# Altium PCB UL-SWAP-DAQ-1.PcbDoc (part 2 of 2)
Units mil, origin at the board's own origin, x right, y up, seen from the top; angles counter-clockwise.
Board outline 2730 x 3320 mil, 4 copper layers (Top Layer, GND, PWR, Bottom Layer), stack 23.756 mil thick; 102 components, 111 nets, 461 pads, 104 vias.
Unrouted connection lines stored in the file: 58.
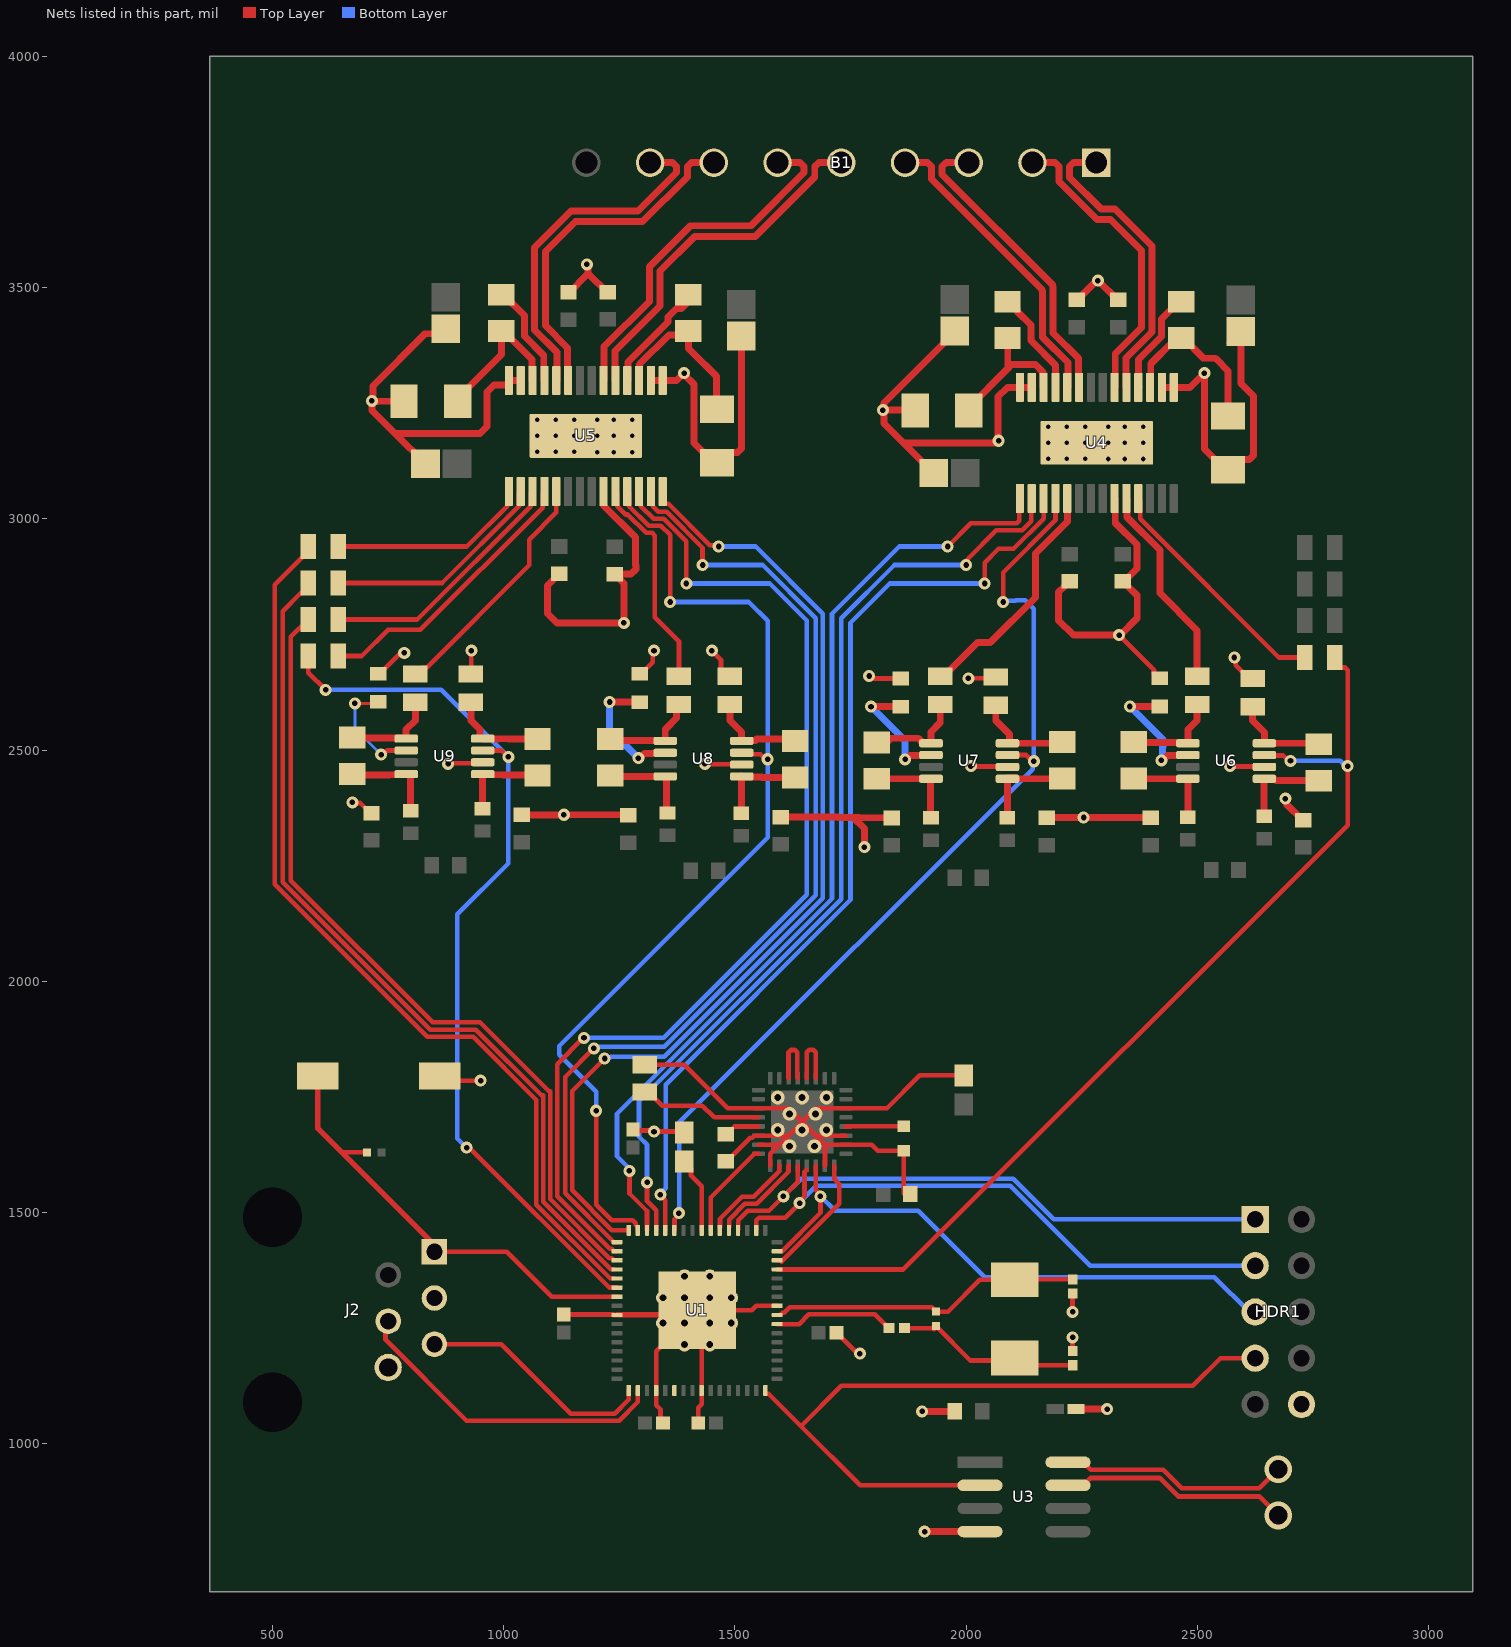
[diagram p4: the nets of this part, all layers, seen from the top]

## Via types
v1: diameter 26, hole 12, Top Layer to Bottom Layer, 94 vias
v2: diameter 42, hole 24, Top Layer to Bottom Layer, 8 vias
v3: diameter 60, hole 40, Top Layer to Bottom Layer, 2 vias

## Nets (pads, with @x,y where several pads share a name; then routed paths per layer and width w, separated by ;. In a path a pad name is that pad's centre, name@x,y a point inside that pad or via, vN(x,y) a via of type N, cw(c..) or ccw(c..) an arc to the next point about the centre after c; other vN are vias at no path point) (continued)
ADCSDI_PIC32SDO: HDR1.1 U1.52 | length 1292.3
  Top Layer w10: U1.52@1506.81,1461.5 1506.81,1482.79 1527.77,1503.75 1573.75,1503.75 v1(1605,1535) 1635.59,1565.59 1635.59,1601.22 1635.67,1601.3
  Bottom Layer w10: v1(1605,1535) 1643,1573 2101.81,1573 2189.81,1485 HDR1.1@2625,1485
ADCSDO_PIC32SDI: HDR1.5 U1.47 | length 1270.6
  Top Layer w10: U1.47@1598.27,1416.5 1602.03,1416.5 1685,1499.46 v1(1685,1535) 1685,1539.33 1675.04,1549.29 1675.04,1601.3
  Bottom Layer w10: v1(1685,1535) 1716.53,1503.47 1896.53,1503.47 2040,1360 2536.73,1360 2611.73,1285 HDR1.5@2625,1285
B_GP0: U1.62 U4.15 | length 2089.9
  Top Layer w10: v1(1272,1590) 1272,1541.1 1309.96,1503.14 U1.62@1309.96,1461.5 ; v1(1960,2940) 2009.95,2989.95 2109.09,2989.95 2114.95,2995.81 2114.95,3042.68 U4.15@2116.3,3044.03
  Bottom Layer w10: v1(1272,1590) 1272,1594.33 1245,1621.33 1245,1713.64 1710,2178.64 1710,2795 1855,2940 v1(1960,2940)
B_GP1: U1.61 U4.16 | length 2073.3
  Top Layer w10: v1(1310,1565) 1310,1524.31 1329.65,1504.67 U1.61@1329.65,1461.5 ; v1(2000,2900) 2003.06,2903.06 2003.06,2913.06 2064.95,2974.95 2115.31,2974.95 2115.36,2975 2121.21,2975 2141.11,2994.89 2141.11,3043.25 U4.16@2141.89,3044.03
  Bottom Layer w10: v1(1310,1565) 1310,1646.07 1292.7,1663.38 1292.7,1740.12 1730,2177.43 1730,2785 1845,2900 v1(2000,2900)
B_GP2: U1.60 U4.17 | length 2069.3
  Top Layer w10: v1(1338.7,1538.7) 1338.7,1536.97 1349.33,1526.34 U1.60@1349.33,1461.5 ; v1(2040,2860) 2040,2905 2070,2935 2102.43,2935 2167.48,3000.05 U4.17@2167.48,3044.03
  Bottom Layer w10: v1(1338.7,1538.7) 1338.7,1540.86 1350.39,1552.55 1350.39,1776.61 1750,2176.21 1750,2775 1835,2860 v1(2040,2860)
BSW: 
C_GP0: U1.64 U5.28 | length 2172.1
  Top Layer w10: v1(1218.11,1832.93) 1147.9,1762.72 1147.9,1547.69 1234.09,1461.5 U1.64@1270.59,1461.5 ; U5.28@1343.98,3059.03 1343.98,3036.39 1347.83,3032.53 1356.33,3032.53 1445.8,2943.06 1461.94,2943.06 v1(1465,2940)
  Bottom Layer w10: v1(1218.11,1832.93) 1221.17,1835.99 1230.96,1835.99 1231.97,1837 1347.15,1837 1690,2179.85 1690,2795 1545,2940 v1(1465,2940)
C_GP1: U1.1 U5.27 | length 2219.6
  Top Layer w10: v1(1195,1855) 1132.9,1792.9 1132.9,1541.47 1238.46,1435.91 U1.1@1245,1435.91 ; U5.27@1318.39,3059.03 1322.24,3055.17 1322.24,3027.41 1334.65,3015 1352.65,3015 1430,2937.65 v1(1430,2900)
  Bottom Layer w10: v1(1195,1855) 1198.06,1858.06 1347,1858.06 1675,2186.07 1675,2785 1560,2900 v1(1430,2900)
C_GP2: U1.2 U5.26 | length 2295.7
  Top Layer w10: v1(1173.68,1877.5) 1172.5,1877.5 1115.52,1820.52 1115.52,1535.4 1229.74,1421.18 1233.5,1421.18 1238.46,1416.22 U1.2@1245,1416.22 ; U5.26@1292.8,3059.03 1296.65,3055.17 1296.65,3027.41 1324.06,3000 1346.44,3000 1395,2951.44 v1(1395,2860)
  Bottom Layer w10: v1(1173.68,1877.5) 1174.18,1878 1345.72,1878 1655,2187.28 1655,2780 1575,2860 v1(1395,2860)
CB1: 
CB2: 
CN: 
CP: 
D_GP0: D_GP0.1 D_GP0.2 U1.5 U5.15 | length 2413.4
  Top Layer w10: D_GP0.2@577.52,2940 577.52,2930.16 505,2857.64 505,2210 835,1880 933.79,1880 1070.52,1743.26 1070.52,1516.76 1229.84,1357.44 U1.5@1238.19,1357.44 ; D_GP0.1@642.48,2940 920,2940 1007.44,3027.44 1007.44,3055.17 U5.15@1011.3,3059.03
D_GP1: D_GP2.1@642.48,2861.09 D_GP2.2@577.52,2861.09 U1.4 U5.16 | length 2362.8
  Top Layer w10: D_GP2.2@577.52,2861.09 577.52,2851.25 565.79,2839.52 561.62,2839.52 521.95,2799.85 521.95,2214.26 841.21,1895 940,1895 1081.74,1753.26 1085.52,1753.26 1085.52,1522.97 1231.37,1377.13 U1.4@1238.19,1377.13 ; D_GP2.1@642.48,2861.09 866.72,2861.09 1033.03,3027.41 1033.03,3055.17 U5.16@1036.89,3059.03
D_GP2: D_GP2.1@642.48,2782.18 D_GP2.2@577.52,2782.18 U1.3 U5.17 | length 2305.7
  Top Layer w10: D_GP2.2@577.52,2782.18 540,2744.66 540,2217.43 846.21,1911.21 948.79,1911.21 1098.1,1761.9 1100.52,1761.9 1100.52,1529.18 1228.49,1401.22 1233.78,1401.22 U1.3@1238.19,1396.81 ; D_GP2.1@642.48,2782.18 813.4,2782.18 1058.62,3027.41 1058.62,3055.17 U5.17@1062.48,3059.03
DOUT_N: U3.8 | length 495.1
  Top Layer w10: U3.8@2220.12,960 2253.68,960 2269.68,944 2426.02,944 2466.02,904 2634,904 v3(2675,945)
DOUT_P: U3.7 | length 499
  Top Layer w10: U3.7@2222.89,907.23 U3.7@2220.12,910 2253.68,910 2269.68,926 2418.56,926 2458.56,886 2634,886 v3(2675,845)
FB: 
FBN: 
FBP: 
GND: C1.1 C2.1 C3.1 C4.1 C5.2 C6.2 C7.2 C8.1 C9.2 C10.2 C11.1 C12.1 C13.1 C14.2 C15.2 C16.2 C17.2 C18.2 C19.2 C20.2 C21.2 C22.2 C23.2 C24.2 C25.2 C26.2 C27.2 C28.2 C29.2 C30.2 C31.2 C32.2 C33.2 C35.2 C36.2 C38.2 C39.2 C40.2 C42.2 C43.2 C44.2 C46.2 C47.2 C48.2 HDR1.10 J2.3 MCLR.1 pad. R9.1 R15.1 R21.1 R27.1 U1.9 U1.20 U1.25 U1.41 U1.65 U1.66 U1.67 U1.68 U1.69 U1.70 U1.71 U1.72 U1.73 U1.74 U1.75 U1.76 U1.77 U3.4 U4.1 U4.2 U4.13 U4.14 U4.23 U4.29 U4.30 U4.31 U4.32 U4.33 U4.34 U4.35 U4.36 U4.37 U4.38 U4.39 U4.40 U4.41 U4.42 U4.43 U4.44 U4.45 U4.46 U4.47 U5.1 U5.2 U5.13 U5.14 U5.23 U5.29 U6.6 U7.6 U8.6 U9.6 | length 9577.4
  Top Layer w10: v1(673,2386.94) 674.46,2385.48 690.28,2385.48 712.2,2363.56 C33.2@714.16,2363.56 ; C32.2@728.98,2665.07 731.93,2665.07 773.79,2706.94 781.94,2706.94 v1(785,2710) ; MCLR.1@861.89,1795 871.89,1785 v1(950,1785) ; v1(880,2470) 881.72,2471.72 953.01,2471.72 U9.6@954.73,2473.44 ; R9.1@928.98,2664.54 930,2665.57 v1(930,2715) ; C1.1@1130,1279.29 1237.6,1279.29 1238.46,1278.43 U1.9@1245,1278.43 ; C4.1@1283.85,1673.14 1287.85,1677.15 1322.85,1677.15 v1(1325,1675) 1388.14,1675 C5.2@1390,1673.14 ; C15.2@1293.98,2664.54 1296.93,2664.54 1321.94,2689.55 1321.94,2711.94 v1(1325,2715) ; C9.2@1305,1819.53 1390.47,1819.53 1484.69,1725.32 1615.98,1725.32 1645.51,1695.79 ; C2.1@1344.29,1045 1339.02,1050.28 1339.02,1074.17 1329.65,1083.54 U1.20@1329.65,1115.04 1329.65,1199.69 U1.65@1408.39,1278.43 ; C3.1@1420.71,1045 1420.71,1077.66 1428.07,1085.02 U1.25@1428.07,1115.04 1428.07,1278.43 U1.65@1418.23,1288.27 1535.98,1288.27 1545.83,1298.11 U1.41@1591.46,1298.11 ; v1(1435,2470) 1435.78,2469.22 1513.95,2469.22 U8.6@1514.73,2468.44 ; v1(1450,2715) 1469.8,2695.2 1469.8,2673.24 1483.5,2659.54 R15.1@1488.98,2659.54 ; C10.2@1480,1610.47 1481.97,1610.47 1532.99,1661.5 1537.56,1661.5 1542.32,1666.26 1615.98,1666.26 ; 1551.02,1646.57 1596.3,1646.57 ; 1576.61,1601.3 1576.61,1626.89 1596.3,1646.57 ; 1694.72,1601.3 1694.73,1646.57 ; C8.1@1719.29,1240 1720.08,1240 1762.02,1198.06 1766.94,1198.06 v1(1770,1195) ; 1740,1666.26 1675.04,1666.26 ; v1(1790,2660) 1794.33,2660 1799.79,2654.54 C39.2@1858.98,2654.54 ; C11.1@1865.75,1540 1865.37,1540.37 1865.37,1633.05 C12.1@1865,1633.43 1809.04,1633.43 1795.89,1646.57 1694.73,1646.57 ; C13.1@1995,1796.57 1900.05,1796.57 1828.8,1725.32 1675.04,1725.32 1645.51,1695.79 ; v1(2005,2655) 2061.01,2655 R21.1@2063.98,2657.97 ; v1(2010,2465) 2010.78,2464.22 2088.55,2464.22 U7.6@2089.33,2463.44 ; C7.2@2230,1200.35 v1(2230,1230) ; v1(2230,1285) C6.2@2230,1324.65 ; v1(2330.79,2748.29) 2406.26,2672.83 2406.26,2664.84 2416.02,2655.07 C43.2@2418.98,2655.07 ; v1(2570,2465) 2570.78,2464.22 2643.95,2464.22 U6.6@2644.73,2463.44 ; v1(2580,2700) 2583.06,2696.94 2583.06,2682.99 2611.51,2654.54 R27.1@2619.38,2654.54 ; 1596.3,1646.57 1615.98,1666.26 ; 1615.98,1666.26 1645.51,1695.79 ; 1645.51,1695.79 1675.04,1666.26 ; 1675.04,1666.26 1694.73,1646.57
  Top Layer w12: U1.9@1245,1278.43 1408.39,1278.43 U1.65@1418.23,1288.27 ; C23.2@1975,3405.98 C23.2@1999.63,3381.35 ; C26.2@2569.34,3380.38 C26.2@2593.98,3405.01
  Top Layer w15: 768.98,3184.03 948.98,3184.03 963.98,3199.03 963.98,3274.03 978.98,3289.03 1009.94,3289.03 1011.3,3290.39 U5.14@1011.3,3299.19 ; C18.2@784.54,3254.03 726.82,3254.03 726.9,3253.95 716.05,3253.95 v1(715,3255) ; C19.2@830.51,3119.03 767.24,3182.3 715,3234.54 v1(715,3255) ; C14.2@875,3410.98 864.03,3400.01 829.96,3400.01 717.1,3287.16 717.1,3257.1 v1(715,3255) ; U5.14@1014.13,3299.19 U5.13@1036.89,3299.19 ; C35.2@1039.19,2359.85 1039.38,2359.44 v1@1130,2359.44 ; C21.2@1120,2880.94 1118.03,2880.94 1109.78,2872.7 1109.78,2870.73 1095,2855.94 1095,2795 1115,2775 v1(1260,2775) 1260,2860.47 1250.22,2870.26 1250.22,2872.22 1241.97,2880.47 C22.2@1240,2880.47 1275.47,2880.47 1285.86,2890.86 1285.86,2899.14 1285,2900 1285,2960 1216.02,3028.98 U5.23@1216.02,3059.03 ; v1(1130,2360) 1267.94,2360 C36.2@1269.38,2358.56 ; C15.2@1140.19,3489.53 1142.15,3489.53 1180.41,3527.78 ; U5.29@1177.64,3179.11 U5.29@1216.02,3140.72 ; v1(1180,3550) 1182.1,3547.9 1182.1,3528.5 1182.51,3528.1 ; 1184.62,3528.41 1223.03,3490 C16.2@1225,3490 ; U5.29@1277.64,3144.11 U5.29@1278.99,3144.11 ; U5.2@1318.39,3299.19 1345.18,3299.19 1345.33,3299.03 1374.03,3299.03 v1(1390,3315) 1390,3312.02 1411.14,3290.88 1411.14,3164.26 1454.49,3120.91 C20.2@1461.43,3120.91 ; C20.2@1461.76,3121.24 1483.57,3143.05 1505.19,3143.05 1513.98,3151.84 C17.2@1513.98,3395.01 ; C38.2@1599.19,2354.85 1599.27,2354.92 1722.42,2354.92 ; 1722.5,2354.44 1755.56,2354.44 ; v1(1780,2290) 1780,2330 1755.56,2354.44 ; C40.2@1838.98,2353.03 1838.47,2353.53 1769.48,2353.53 1768.57,2354.44 1755.56,2354.44 ; 1868.98,3164.03 2058.98,3164.03 2068.98,3174.03 2068.98,3264.03 2089.13,3284.19 U4.14@2116.3,3284.19 ; C27.2@1889.54,3234.03 1888.57,3235 v1(1820,3235) ; v1(1905,1070) C48.2@1975.47,1070 ; v1(1910,810) U3.4@2029.88,810 ; C28.2@1929.96,3099.03 1929.53,3099.03 1822.1,3206.45 1822.1,3232.9 v1(1820,3235) ; C23.2@1975,3405.98 1951.87,3382.85 1951.87,3380.25 1822.1,3250.49 1822.1,3237.1 v1(1820,3235) ; U4.14@2118.98,3284.03 2141.73,3284.03 U4.13@2141.89,3284.19 ; C42.2@2173.98,2348.56 2179.45,2354.03 2328.98,2354.03 2329.21,2353.79 2399.14,2353.79 C44.2@2399.38,2353.56 ; C30.2@2223.98,2864.5 2222.01,2864.5 2213.76,2856.25 2213.76,2855.01 2200,2841.25 2200,2780 2231.71,2748.29 v1(2330.79,2748.29) 2333.29,2748.29 2370,2785 2370,2834 2349.19,2854.81 2349.19,2856.25 C31.2@2340.94,2864.5 ; C47.2@2234.53,1075 v1(2305,1075) ; C24.2@2238.98,3473.56 2240.94,3473.56 2282.39,3515 2285.57,3515 2327.01,3473.56 C25.2@2328.98,3473.56 ; U4.23@2321.02,3044.03 2322.38,3042.67 2322.38,2991.29 2369.19,2944.48 2369.19,2892.75 C31.2@2340.94,2864.5 ; C31.2@2338.98,2864.5 C31.2@2340.94,2864.5 ; U4.2@2423.39,3284.19 U4.1@2448.98,3284.19 2484.19,3284.19 v1(2515,3315) 2515,3150.4 C29.2@2559.49,3105.91 ; C29.2@2564.89,3104.37 2588.57,3128.05 2612.12,3128.05 2620.91,3136.84 2620.91,3265.54 2593.98,3292.47 C26.2@2593.98,3405.01 ; v1(2690,2395) 2692.1,2392.9 2692.1,2383.68 2727.23,2348.56 C46.2@2729.19,2348.56
  other v1: 2254.21,2354.03 2070,3168.67 2285,3515
INP: 
MCLR: J2.1 MCLR.2 R3.1 U1.7 | length 956.1
  Top Layer w10: 650,1630 R3.1@704.25,1630 ; J2.1@850.28,1415 1007.05,1415 1104.25,1317.8 U1.7@1245,1317.8
  Top Layer w12: MCLR.2@598.11,1795 598.11,1681.89 650,1630 J2.1@848.23,1431.77
MULTI: 
MUXOUT_ADCIN+:  | length 136.3
  Top Layer w10: 1655.35,1790.28 1655.35,1846.26 1661.03,1851.95 1669.32,1851.95 1675,1846.26 1675,1790.32 1675.04,1790.28
MUXOUT_ADCIN-:  | length 135.3
  Top Layer w10: 1615.98,1790.28 1615.98,1846.07 1621.35,1851.44 1629.63,1851.44 1635,1846.07 1635,1790.95 1635.67,1790.28
NetB2_4: 
NetC5_1: C5.1 U1.56 | length 164.3
  Top Layer w10: C5.1@1390,1610 1404.92,1595.08 1404.92,1580.08 1428.07,1556.93 U1.56@1428.07,1461.5
NetC6_1: C6.1 R2.1 U1.40 X1.1 | length 671.1
  Top Layer w10: U1.40@1598.27,1278.7 1602.95,1283.39 1606.72,1283.39 1618.33,1295 1925.75,1295 R2.1@1935,1285.75 1960.75,1285.75 2029.65,1354.65 X1.1@2105,1354.65 2105.71,1355.35 C6.1@2230,1355.35
NetC7_1: C7.1 R1.2 R2.2 X1.2 | length 502.7
  Top Layer w10: R1.2@1866.73,1250 R2.2@1930.75,1250 ; R2.2@1935,1254.25 2009.25,1180 2099.65,1180 X1.2@2105,1185.35 2115.71,1174.65 2106.17,1173.69 2065.71,1169.65 2106.17,1169.65 2115.71,1169.65 C7.1@2230,1169.65
  Top Layer w15: R2.2@1930.75,1250 R2.2@1935,1254.25
NetC15_1: C15.1@1293.98,2603.52 U8.2 | length 275
  Top Layer w15: v1(1229.23,2603.77) 1293.72,2603.77 C15.1@1293.98,2603.52 ; v1(1291.43,2482.22) 1294.41,2482.22 1304.86,2492.67 1348.02,2492.67 U8.2@1349.38,2494.03
  Bottom Layer w15: v1(1229.23,2603.77) 1229.23,2544.42 v1(1291.43,2482.22)
NetC18_1: C18.1 R4.1 U5.12 | length 328
  Top Layer w15: C18.1@900.78,3254.03 900.78,3260.97 995,3355.19 R4.1@995,3405.66 999.92,3405.66 1061.12,3344.45 1061.12,3300.55 U5.12@1062.48,3299.19
NetC20_1: C20.1 R5.1 U5.3 | length 365.2
  Top Layer w15: U5.3@1292.8,3299.19 1294.15,3300.55 1294.15,3334.15 1357.26,3397.26 1391.12,3397.26 R5.1@1399.51,3405.66 1399.51,3368.32 1408.3,3359.53 1408.59,3359.53 1460,3308.12 1460,3239.48 C20.1@1457.67,3237.15
NetC27_1: C27.1 R6.1 U4.12 | length 310.6
  Top Layer w15: C27.1@2005.78,3234.03 2005.78,3240.97 2089.9,3325.09 ; R6.1@2089.9,3390.22 2089.9,3325.09 ; U4.12@2167.48,3284.19 2166.12,3285.55 2166.12,3316.85 2149.83,3333.14 2097.95,3333.14 2089.9,3325.09
NetC29_1: C29.1 R7.1 U4.3 | length 372.4
  Top Layer w15: U4.3@2397.8,3284.19 2399.15,3285.55 2399.15,3335.23 2445.93,3382 2445.93,3388.31 2448.27,3390.66 2469.92,3390.66 2513.51,3347.07 2537.93,3347.07 2540,3345 2541.04,3345 2566.43,3319.61 C29.1@2566.43,3222.15
NetC32_1: C32.1 U9.2 | length 244.4
  Top Layer w6: v1(678.29,2600.76) 725.69,2600.76 C32.1@728.98,2604.05
  Top Layer w10: v1(735,2490) 739.33,2490 748.36,2499.03 U9.2@789.38,2499.03
  Bottom Layer w6: v1(678.29,2600.76) 678.29,2546.71 v1(735,2490)
NetC39_1: C39.1 U7.2 | length 269.1
  Top Layer w15: v1(1794.23,2593.77) 1858.72,2593.77 C39.1@1858.98,2593.52 ; v1(1867.93,2479.86) 1870.91,2479.86 1878.73,2487.67 1922.62,2487.67 U7.2@1923.98,2489.03
  Bottom Layer w15: v1(1794.23,2593.77) 1867.93,2520.07 v1(1867.93,2479.86)
NetC43_1: C43.1 U6.2 | length 269
  Top Layer w15: v1(2353.99,2594.04) C43.1@2413.55,2594.04 ; v1(2422.16,2477.62) 2425.14,2477.62 2435.19,2487.67 2478.02,2487.67 U6.2@2479.38,2489.03
  Bottom Layer w15: v1(2353.99,2594.04) 2425.58,2522.43 2425.58,2507.43 2424.27,2506.13 2424.27,2479.72 v1(2422.16,2477.62)
NetR1_1: R1.1 U1.39 | length 263
  Top Layer w10: U1.39@1591.46,1258.74 1638.76,1258.74 1660.02,1280 1802.28,1280 1832.28,1250 R1.1@1833.27,1250
NetR4_2: R4.2 U5.11 | length 226.6
  Top Layer w15: R4.2@995,3484.4 999.92,3484.4 1045,3439.32 1045,3395 1086.71,3353.29 1086.71,3300.55 U5.11@1088.07,3299.19
NetR5_2: R5.2 U5.4 | length 249.5
  Top Layer w15: U5.4@1268.56,3300.55 1268.56,3338.56 1355,3425 1355,3435.96 1373.51,3454.47 1384.47,3454.47 1399.51,3469.51 R5.2@1399.51,3489.37
NetR6_2: R6.2 U4.11 | length 231
  Top Layer w15: R6.2@2089.46,3469.4 2094.38,3469.4 2110.51,3453.27 2110.51,3448.35 2140,3418.86 2140,3385 2193.07,3331.93 U4.11@2193.07,3284.19
NetR7_2: R7.2 U4.4 | length 228.4
  Top Layer w15: U4.4@2373.56,3285.55 U4.4@2372.2,3284.19 2372.2,3344.17 2422.19,3394.16 2422.19,3431.51 2460.08,3469.4 R7.2@2465,3469.4
NetR8_2: R8.2 R10.1 U9.1 | length 187.4
  Top Layer w15: R10.1@690,2524.37 691.78,2524.37 693.39,2525.98 788.02,2525.98 U9.1@788.98,2525.03 ; U9.1@789.38,2524.62 U9.1@788.98,2525.03 ; R8.2@808.98,2603.52 808.98,2564.03 788.98,2544.03 U9.1@788.98,2525.03
NetR9_2: R9.2 R11.1 U9.8 | length 207.3
  Top Layer w15: R9.2@928.98,2603.52 928.98,2564.03 948.98,2544.03 948.98,2525.98 950.33,2524.62 U9.8@954.73,2524.62 ; U9.8@955.25,2524.11 989.17,2524.11 989.44,2524.37 1010.56,2524.37 1010.83,2524.11 R11.1@1070.15,2524.11
NetR10_2: R10.2 R12.1 U9.4 | length 178.1
  Top Layer w15: R10.2@690,2445.63 690.13,2445.5 752.56,2445.5 753.55,2446.49 788.02,2446.49 U9.4@789.38,2447.85 ; R12.1@798.98,2368.81 U9.4@798.98,2446.49
NetR11_2: R11.2 R13.1 U9.5 | length 209.4
  Top Layer w15: R13.1@954.38,2373.26 954.56,2373.44 U9.5@954.56,2448.45 ; U9.5@970.29,2449.03 953.98,2449.03 U9.5@954.56,2448.45 ; R11.2@1070.15,2445.63 998.96,2445.63 998.1,2446.49 970.29,2446.49 956.09,2446.49 U9.5@954.73,2447.85 U9.5@954.56,2448.45
NetR14_2: R14.2 R16.1 U8.1 | length 192.4
  Top Layer w15: R16.1@1250,2519.37 1251.13,2520.5 1348.5,2520.5 U8.1@1349.38,2519.62 1349.38,2544.43 1373.98,2569.03 1373.98,2594.03 1378.98,2599.03 R14.2@1378.98,2598.52
NetR15_2: R15.2 R17.1 U8.8 | length 188.1
  Top Layer w15: R15.2@1488.98,2598.52 1488.98,2564.03 1513.98,2539.03 1513.98,2520.38 U8.8@1514.73,2519.62 1516.09,2520.98 1544.06,2520.98 1546.51,2523.43 1605.94,2523.43 R17.1@1610,2519.37
NetR16_2: R16.2 R18.1 U8.4 | length 179.3
  Top Layer w15: R16.2@1250,2440.63 1252.22,2442.85 U8.4@1349.38,2442.85 ; U8.4@1351.79,2441.84 1351.79,2366.21 R18.1@1354.19,2363.81
NetR17_2: R17.2 R19.1 U8.5 | length 203.2
  Top Layer w15: R19.1@1513.98,2363.26 1514.36,2363.64 U8.5@1514.36,2443.65 ; U8.5@1513.98,2444.03 U8.5@1514.36,2443.65 ; R17.2@1635,2440.63 R17.2@1630,2440.63 1558.96,2440.63 1558.1,2441.49 1516.09,2441.49 U8.5@1514.73,2442.85 U8.5@1514.36,2443.65
NetR20_2: R20.2 R22.1 U7.1 | length 194.5
  Top Layer w15: R22.1@1829.49,2517.48 1837.49,2525.48 1896.39,2525.48 1907.24,2514.62 U7.1@1923.98,2514.62 1923.98,2539.03 1943.98,2559.03 R20.2@1943.98,2598.52
NetR21_2: R21.2 R23.1 U7.8 | length 214.8
  Top Layer w10: R23.1@2226.48,2513.33 R23.1@2227.7,2512.11
  Top Layer w15: R21.2@2063.98,2596.94 2063.98,2564.03 2093.98,2534.03 2093.98,2515.98 U7.8@2092.62,2514.62 ; U7.8@2105.47,2514.03 2089.33,2514.03 U7.8@2089.33,2514.62 U7.8@2092.62,2514.62 ; R23.1@2189.64,2516.39 2187.88,2514.62 2105.47,2514.62 U7.8@2092.62,2514.62
NetR22_2: R22.2 R24.1 U7.4 | length 173.1
  Top Layer w15: R22.2@1829.49,2438.74 1830.38,2437.85 U7.4@1923.98,2437.85 ; U7.4@1923.07,2431.33 1923.07,2355.71 R24.1@1923.98,2353.26
NetR23_2: R23.2 R25.1 U7.5 | length 203.2
  Top Layer w15: R25.1@2088.98,2353.26 2089.15,2353.44 U7.5@2089.15,2438.85 ; U7.5@2104.88,2439.03 2088.98,2439.03 U7.5@2089.15,2438.85 ; R23.2@2189.64,2437.65 2189.44,2437.85 2104.88,2437.85 U7.5@2089.33,2437.85 U7.5@2089.15,2438.85
NetR26_2: R26.2 R28.1 U6.1 | length 191.8
  Top Layer w15: R28.1@2381.21,2514.75 2382.27,2514.75 2383.5,2515.98 2478.02,2515.98 U6.1@2479.38,2514.62 2479.38,2544.43 2498.98,2564.03 R26.2@2498.98,2599.03
NetR27_2: R27.2 R29.1 U6.8 | length 199.9
  Top Layer w15: R27.2@2619.38,2593.52 2618.98,2594.03 2618.98,2564.03 2644.73,2538.27 U6.8@2644.73,2514.62 2741.01,2514.62 R29.1@2741.99,2515.6 ; R29.1@2762.16,2512.34 R29.1@2773.68,2512.34
NetR28_2: R28.2 R30.1 U6.4 | length 182.2
  Top Layer w15: R28.2@2381.21,2436.01 2383.06,2437.85 U6.4@2479.38,2437.85 R30.1@2479.38,2354.56
NetR29_2: R29.2 R31.1 U6.5 | length 198.7
  Top Layer w15: R31.1@2644.38,2356.96 U6.5@2644.38,2436.49 ; U6.5@2644.73,2437.85 2646.09,2436.49 2667.34,2436.49 2670.23,2433.6 R29.2@2762.16,2433.6
NetR39_1: 
NetU1_22: U1.22
NetU1_46: U1.46 | length 270.7
  Top Layer w10: U1.46@1591.46,1396.54 U1.46@1597.99,1396.54 ; U1.46@1600.64,1393.89 1726,1519.25 1726,1560.93 1714.41,1572.52 1714.41,1601.3
NetU1_53: U1.53 | length 201.1
  Top Layer w10: U1.53@1487.4,1468.31 1487.4,1484.6 1521.56,1518.75 1546.97,1518.75 1615.91,1587.69 1615.91,1601.22 1615.98,1601.3
NetU1_54: U1.54 | length 201.1
  Top Layer w10: U1.54@1467.72,1468.31 1467.72,1486.13 1515.34,1533.75 1540.75,1533.75 1596.22,1589.22 1596.22,1601.22 1596.3,1601.3
NetU1_55: U1.55 | length 213.3
  Top Layer w10: U1.55@1447.76,1461.5 1447.76,1532.32 1542.32,1626.89 1551.02,1626.89
OUTN: 
PGA_A_Out: R26.1 U4.24 | length 447.8
  Top Layer w15: U4.24@2346.61,3044.03 2347.97,3042.67 2347.97,3003.29 2418.98,2932.29 2418.98,2839.03 2499.38,2758.63 R26.1@2499.38,2659.54
PGA_B_Out: R20.1 U4.19 | length 519.8
  Top Layer w15: R20.1@1943.98,2659.54 1951.85,2659.54 2024.43,2732.12 2052.07,2732.12 2150,2830.05 2150,2925 2219.5,2994.5 2219.5,3043.19 U4.19@2218.66,3044.03
PGA_C_Out: R14.1 U5.24 | length 466.7
  Top Layer w10: U5.24@1241.61,3059.03 1245.47,3055.17 1245.47,3027.41 1263.77,3009.11 1268.15,3009.11 1307.86,2969.39 1321.14,2969.39 1327,2963.54 1327,2787.37 1378.98,2735.4 R14.1@1378.98,2659.54
PGA_D_Out: R8.1 U5.19 | length 526.9
  Top Layer w10: R8.1@808.98,2664.54 822.68,2678.24 833.24,2678.24 1055,2900 1055,2955 1113.66,3013.66 U5.19@1113.66,3059.03
PGC: J2.5 U1.17 | length 514.6
  Top Layer w10: J2.5@850.28,1215 995,1215 1145,1065 1240,1065 1270.59,1095.59 U1.17@1270.59,1115.04
PGD: J2.4 U1.18 | length 701.9
  Top Layer w10: J2.4@750.28,1265 744.61,1259.33 744.61,1225.04 919.65,1050 1250,1050 1290.28,1090.28 U1.18@1290.28,1115.04
Qnet: 
REFBUF: C9.1 | length 268.7
  Top Layer w10: C9.1@1305,1760.47 1312.87,1760.47 1342.43,1730.91 1429.7,1730.91 1454.98,1705.63 1551.02,1705.63
REFIN: C10.1 | length 77.8
  Top Layer w10: C10.1@1480,1669.53 1481.97,1669.53 1498.38,1685.94 1551.02,1685.94
Reserved: J2.6
SCK: HDR1.3 U1.50 | length 1283.3
  Top Layer w10: U1.50@1546.18,1461.5 1546.18,1482.89 1552.04,1488.75 1608.75,1488.75 v1(1640,1520) 1640,1524.33 1650.59,1534.92 1650.59,1587.84 1655.28,1592.52
  Bottom Layer w10: v1(1640,1520) 1640,1522.53 1675.47,1558 2095.6,1558 2268.6,1385 HDR1.3@2625,1385
Sensor_A_N: B1.1 U4.5 | length 653.3
  Top Layer w15: B1.1@2281.18,3770 2232.57,3770 2223.78,3761.21 2223.78,3738.32 2292.15,3669.96 2321.64,3669.96 2402.19,3589.4 2402.19,3404.05 2345.32,3347.18 2345.32,3285.48 U4.5@2346.61,3284.19
Sensor_A_P: B1.2 U4.6 | length 653.3
  Top Layer w15: B1.2@2143.39,3770 2192,3770 2200.78,3761.21 2200.78,3728.79 2282.62,3646.96 2312.11,3646.96 2379.19,3579.87 2379.19,3413.58 2322.32,3356.7 2322.32,3285.48 U4.6@2321.02,3284.19
Sensor_B_N: B1.4 U4.10 | length 660.7
  Top Layer w15: B1.4@1867.8,3770 1916.41,3770 1925.19,3761.21 1925.19,3734.81 2164.26,3495.74 2164.26,3493.59 2165.01,3492.84 2165.01,3392.46 2219.96,3337.52 2219.96,3285.48 U4.10@2218.66,3284.19
Sensor_B_P: B1.3 U4.9 | length 660.7
  Top Layer w15: B1.3@2005.59,3770 1956.98,3770 1948.19,3761.21 1948.19,3744.33 2187.26,3505.27 2187.26,3503.12 2188.01,3502.37 2188.01,3401.99 2242.96,3347.04 2242.96,3285.48 U4.9@2244.25,3284.19
Sensor_C_N: B1.5 U5.5 | length 779.3
  Top Layer w15: U5.5@1241.61,3299.19 1240.32,3300.48 1240.32,3362.59 1337.93,3460.2 1337.93,3535.4 1413.14,3610.61 1543.96,3610.61 1672.6,3739.26 1672.6,3761.21 1681.39,3770 B1.5@1730,3770
Sensor_C_P: B1.6 U5.6 | length 779.3
  Top Layer w15: U5.6@1216.02,3299.19 1217.32,3300.48 1217.32,3372.12 1314.93,3469.73 1314.93,3544.93 1403.61,3633.61 1534.43,3633.61 1649.6,3748.79 1649.6,3761.21 1640.82,3770 B1.6@1592.2,3770
Sensor_D_N: B1.8 U5.10 | length 755.7
  Top Layer w15: U5.10@1113.66,3299.19 1114.96,3300.48 1114.96,3360.04 1066.97,3408.03 1066.97,3586.97 1145.3,3665.3 1290.53,3665.3 1374.01,3748.79 1374.01,3761.21 1365.23,3770 B1.8@1316.61,3770
Sensor_D_P: B1.7 U5.9 | length 755.7
  Top Layer w15: U5.9@1139.25,3299.19 1137.96,3300.48 1137.96,3369.57 1089.97,3417.56 1089.97,3577.44 1154.83,3642.3 1300.06,3642.3 1397.01,3739.26 1397.01,3761.21 1405.8,3770 B1.7@1454.41,3770
SHDN-A: SHDN_A.1 SHDN_A.2 U1.45 U4.25 U6.7 | length 2730
  Top Layer w10: U1.45@1591.46,1376.85 1864.32,1376.85 2825,2337.53 v1(2825,2465) 2825,2672.48 2819.06,2678.43 2809.21,2678.43 2797.48,2690.16 SHDN_A.2@2797.48,2700 ; U4.25@2372.2,3044.03 2376.06,3040.17 2376.06,2999.95 2676.01,2700 SHDN_A.1@2732.52,2700 ; U6.7@2644.73,2489.03 2648.42,2485.35 2651.22,2488.15 2685.32,2488.15 2696.95,2476.53 v1(2701.28,2476.53)
  Bottom Layer w10: v1(2701.28,2476.53) 2809.15,2476.53 2820.67,2465 v1(2825,2465)
SHDN-B: U1.59 U4.18 U7.7 | length 2074.3
  Top Layer w10: U1.59@1369.02,1461.5 1369.29,1461.77 1369.29,1484.96 1378.7,1494.37 v1(1378.7,1498.7) ; v1(2080,2820) 2080,2883.76 2193.07,2996.83 U4.18@2193.07,3044.03 ; U7.7@2089.33,2489.03 2089.38,2489.08 2129.92,2489.08 2143.3,2475.7 v1(2146.22,2475.7)
  Bottom Layer w10: v1(1378.7,1498.7) 1380,1500 1380,1695 2143.66,2458.66 2143.66,2473.14 v1(2146.22,2475.7) 2146.22,2805.25 2127.93,2823.54 2107.9,2823.54 2107.42,2823.06 2083.06,2823.06 v1(2080,2820)
SHDN-C: U1.63 U5.25 U8.7 | length 2184
  Top Layer w10: v1(1200,1720) 1200,1516.8 1233.49,1483.31 1278.76,1483.31 1285.31,1476.76 1285.31,1472.99 1290.28,1468.03 U1.63@1290.28,1461.5 ; U5.25@1267.2,3059.03 1271.06,3055.17 1271.06,3027.41 1313.47,2985 1340,2985 1360,2965 v1(1360,2820) ; U8.7@1514.73,2494.03 1517.63,2491.13 1555.32,2491.13 1566.46,2480 v1(1570.79,2480)
  Bottom Layer w10: v1(1200,1720) 1200,1761.31 1120,1841.31 1120,1860 1570.79,2310.79 1570.79,2779.21 1530,2820 v1(1360,2820)
SHDN-D: SHDN_D.1 SHDN_D.2 U1.6 U5.18 U9.7 | length 2565.2
  Top Layer w10: SHDN_D.2@577.52,2703.28 577.52,2667.48 v1(615,2630) ; SHDN_D.1@642.48,2703.28 693.28,2703.28 750,2760 820,2760 1084.21,3024.21 1084.21,3055.17 U5.18@1088.07,3059.03 ; v1(920,1640) 923.06,1636.94 929.13,1636.94 1228.31,1337.76 1244.72,1337.76 U1.6@1245,1337.48 ; U9.7@954.73,2499.03 954.81,2498.95 995.32,2498.95 1009.27,2485 v1(1010,2485)
  Bottom Layer w10: v1(615,2630) 865,2630 v1(1010,2485) 1010,2254.57 900,2144.57 900,1660 v1(920,1640)
SW1: 
SW2: 
U1TX: HDR1.7 U1.32 U3.2 | length 1588.8
  Top Layer w10: U1.32@1566.14,1108.23 1572.68,1108.23 1642.95,1037.95 ; U3.2@2029.88,910 1770.91,910 1642.95,1037.95 ; HDR1.7@2625,1185 2550,1185 2490,1125 1730,1125 1642.95,1037.95
VDDLBYP: C12.2 | length 125.3
  Top Layer w10: 1740,1685.94 1748.7,1685.94 1749.33,1686.57 C12.2@1865,1686.57
Vin: 
VREF: 
pads on no net: B1.9 HDR1.9 J2.MH1 J2.MH2 U1.8 U1.11 U1.12 U1.13 U1.14 U1.15 U1.16 U1.21 U1.23 U1.24 U1.27 U1.28 U1.29 U1.30 U1.31 U1.33 U1.34 U1.36 U1.37 U1.48 U1.49 U1.51 U1.58 U2.1 U2.2 U2.3 U2.4 U2.5 U2.6 U2.7 U2.8 U2.9 U2.10 U2.11 U2.12 U2.13 U2.14 U2.15 U2.16 U2.17 U2.18 U2.19 U2.20 U2.21 U2.22 U2.23 U2.24 U2.25 U2.26 U2.27 U2.28 U2.29 U2.30 U2.31 U2.32 U2.33 U3.3 U3.5 U3.6

## Polygon pours and split planes (outlines as drawn)
GND on Top Layer "GND_L01_P004" (solid, pour order 4): 1030,3245 1325,3245 1325,3115 1030,3115
GND on Top Layer "GND_L01_P003" (solid, pour order 3): 2130,3230 2430,3230 2430,3100 2130,3100
GND on Top Layer "GND_L01_P002" (solid, pour order 2): 1285,1420 1550,1420 1550,1155 1285,1155
GND on GND (split plane): 3074.9,700.1 385.1,700.1 385.1,3979.9 3074.9,3979.9
+3.3V on PWR (split plane): 2509.91,1235 2510.26,1232.39 2511.26,1229.96 2512.87,1227.87 2514.96,1226.27 2517.39,1225.26 2520,1224.91 2794.91,1224.91 2794.91,700.1 525.09,700.1 525.09,1775 525.09,1864.91 2509.91,1864.91
+5V on PWR (split plane): 3074.9,700.1 2815.09,700.1 2815.09,1235 2814.74,1237.61 2813.73,1240.04 2812.13,1242.13 2810.04,1243.73 2807.61,1244.74 2805,1245.09 2530.09,1245.09 2530.09,1875 2529.74,1877.61 2528.74,1880.04 2527.13,1882.13 2525.04,1883.73 2522.61,1884.74 2520,1885.09 515,1885.09 512.39,1884.74 509.96,1883.73 507.87,1882.13 506.26,1880.04 505.26,1877.61 504.91,1875 504.91,1775 504.91,700.1 385.1,700.1 385.1,3979.9 3074.9,3979.9
+10.5V on PWR (split plane): 1312.87,3442.87 1314.96,3441.26 1315.67,3440.97 1317.39,3440.26 1320,3439.91 1590,3439.91 1592.61,3440.26 1595.04,3441.26 1597.13,3442.87 1754.18,3599.91 2274.91,3599.91 2274.91,3454.18 1895.37,3074.63 1893.77,3072.54 1892.76,3070.11 1892.41,3067.5 1892.76,3064.89 1893.77,3062.46 1895.37,3060.37 2012.87,2942.87 2014.96,2941.26 2017.39,2940.26 2020,2939.91 2390.82,2939.91 2422.87,2907.87 2427.87,2902.87 2662.87,2667.87 2849.91,2480.82 2849.91,1350.09 2685.09,1350.09 2685.09,1424.91 2795,1424.91 2797.61,1425.26 2800.04,1426.27 2802.13,1427.87 2803.74,1429.96 2804.74,1432.39 2805.09,1435 2805.09,2410 2804.74,2412.61 2804.03,2414.33 2803.74,2415.04 2802.13,2417.13 2362.13,2857.13 2360.04,2858.74 2357.61,2859.74 2355,2860.09 2285,2860.09 2282.39,2859.74 2279.96,2858.74 2277.87,2857.13 2276.26,2855.04 2275.26,2852.61 2274.91,2850 2274.91,2760.09 2190.09,2760.09 2190.09,2850 2189.74,2852.61 2188.74,2855.04 2187.13,2857.13 2185.04,2858.74 2182.61,2859.74 2180,2860.09 1215,2860.09 1212.46,2859.75 1185.09,2887.12 1185.09,2890 1184.74,2892.61 1183.73,2895.04 1182.13,2897.13 1180.04,2898.74 1177.61,2899.74 1175,2900.09 1172.39,2899.74 1169.96,2898.74 1167.87,2897.13 1166.27,2895.04 1165.26,2892.61 1164.91,2890 1164.91,2782.59 1100.79,2782.59 795.09,3088.29 795.09,3614.91 1140.82,3614.91
-10V on PWR (split plane): 2549.91,3725 2549.91,3540.09 2295.09,3540.09 2295.09,3610 2294.74,3612.61 2293.74,3615.04 2292.13,3617.13 2290.04,3618.74 2287.61,3619.74 2285,3620.09 1750,3620.09 1747.39,3619.74 1745.67,3619.03 1744.96,3618.74 1742.87,3617.13 1585.82,3460.09 1324.18,3460.09 1152.13,3632.13 1150.04,3633.74 1147.61,3634.74 1145,3635.09 785,3635.09 782.39,3634.74 779.96,3633.74 777.87,3632.13 776.26,3630.04 775.26,3627.61 774.91,3625 774.91,3084.11 775.26,3081.5 776.26,3079.07 777.87,3076.98 1089.48,2765.37 1091.57,2763.76 1094,2762.76 1096.61,2762.41 1175,2762.41 1177.61,2762.76 1180.04,2763.76 1182.13,2765.37 1183.73,2767.46 1184.74,2769.89 1185.09,2772.5 1185.09,2872.7 1205.25,2852.54 1204.91,2850 1205.26,2847.39 1206.27,2844.96 1207.87,2842.87 1209.96,2841.26 1212.39,2840.26 1215,2839.91 2169.91,2839.91 2169.91,2750 2170.26,2747.39 2171.26,2744.96 2172.87,2742.87 2174.96,2741.26 2177.39,2740.26 2180,2739.91 2285,2739.91 2287.61,2740.26 2290.04,2741.26 2292.13,2742.87 2293.74,2744.96 2294.74,2747.39 2295.09,2750 2295.09,2839.91 2350.82,2839.91 2784.91,2405.82 2784.91,1445.09 2685.09,1445.09 2685.09,2265 2684.74,2267.61 2683.74,2270.04 2682.13,2272.13 2357.13,2597.13 2355.04,2598.74 2352.61,2599.74 2350,2600.09 1084.18,2600.09 575.09,3109.18 575.09,3869.91 2549.91,3869.91

## Other copper
PWR (plane layer: these items are gaps in the copper):
  lines w10: 1175,2890 1215,2850
  lines w20: 515,685 515,1775 515,1875 2520,1875 2520,1235 2805,1235 2805,685 ; 1175,2890 1175,2772.5 1096.61,2772.5 785,3084.11 785,3625 1145,3625 1320,3450 1590,3450 1750,3610 2285,3610 2285,3450 1902.5,3067.5 2020,2950 2395,2950 2430,2915 2860,2485 2860,1340 2675,1340 2675,1435 ; 1215,2850 2180,2850 2180,2750 2285,2750 2285,2850 2355,2850 2795,2410 2795,1435 2675,1435 ; 2285,3530 2555,3530 2560,3535 2560,3725 2560,3880 565,3880 565,3105 1080,2590 1357.5,2590 2350,2590 2675,2265 2675,1435 ; 2435,2920 2435,2910 2670,2675

## Silkscreen, mask and mechanical layers (free items; w line width, h text height)
Top Overlay:
  circle w7.87: c2470,2690 r1.97
  circle w7.87: c1885.16,2276 r1.97
  circle w7.87: c1320.16,2381 r1.97
  circle w7.87: c650.16,2556 r1.97
  circle w7.87: c758.98,2284.03 r1.97
  circle w7.87: c2135,2550 r1.97
  circle w7.87: c2498.98,3259.03 r1.97
  circle w7.87: c2510,3375 r1.97
  circle w7.87: c2528.98,3519.03 r1.97
  circle w7.87: c2685,2550 r1.97
  circle w7.87: c2584.38,2674.03 r1.97
  circle w7.87: c2510,2195 r1.97
  circle w7.87: c2445,2565 r1.97
  circle w7.87: c2320,2550 r1.97
  circle w7.87: c1785,2540 r1.97
  circle w7.87: c2445,2275 r1.97
  circle w7.87: c2445,2375 r1.97
  circle w7.87: c2610,2375 r1.97
  circle w7.87: c2150,3375 r1.97
  circle w7.87: c2273.98,3394.03 r1.97
  circle w7.87: c1489.38,2374.03 r1.97
  circle w7.87: c1305,2280 r1.97
  circle w7.87: c1338.98,2679.03 r1.97
  circle w7.87: c1378.98,2189.03 r1.97
  circle w7.87: c1454.38,2679.03 r1.97
  circle w7.87: c1603.98,2574.03 r1.97
  circle w7.87: c1010,2560 r1.97
  circle w7.87: c890,2685 r1.97
  circle w7.87: c920,2295 r1.97
  circle w7.87: c763.98,2589.03 r1.97
  circle w7.87: c923.98,2394.03 r1.97
  circle w7.87: c1083.98,2279.03 r1.97
  circle w7.87: c1648.98,2269.03 r1.97
  circle w7.87: c763.98,2389.03 r1.97
  circle w7.87: c2038.98,3304.03 r1.97
  circle w7.87: c2358.98,3394.03 r1.97
  circle w7.87: c2043.98,2249.03 r1.97
  circle w7.87: c2218.98,2264.03 r1.97
  circle w7.87: c1868.98,2249.03 r1.97
  circle w7.87: c1903.98,2674.03 r1.97
  circle w7.87: c1893.98,2579.03 r1.97
  circle w7.87: c1890,2375 r1.97
  circle w7.87: c2055,2375 r1.97
  circle w7.87: c2023.98,2669.03 r1.97
  circle w7.87: c2773.98,2269.03 r1.97
  circle w7.87: c2038.98,3159.03 r1.97
  circle w7.87: c1933.98,3524.03 r1.97
  lines w10: 773.98,2604.03 773.98,2664.03 ; 844.38,2604.03 844.38,2664.03 ; 893.98,2604.03 893.98,2664.03 ; 963.98,2604.03 963.98,2664.03 ; 1339.38,2599.03 1339.38,2659.03 ; 1419.38,2599.03 1419.38,2659.03 ; 1449.38,2601.12 1449.38,2661.12 ; 1529.38,2601.12 1529.38,2661.12 ; 1913.98,2604.03 1913.98,2654.03 ; 1973.98,2604.03 1973.98,2654.03 ; 2033.98,2604.03 2033.98,2654.03 ; 2093.98,2604.03 2093.98,2654.03 ; 2469.38,2599.03 2469.38,2659.03 ; 2529.38,2599.03 2529.38,2659.03 ; 2589.38,2596.12 2589.38,2656.12 ; 2649.38,2596.12 2649.38,2656.12 ; 2610,790 2740,790 2740,995 2610,995 2610,790
  text "D-" at 1302,3847 h30
  text "D+" at 1432,3847 h30
  text "C+" at 1572,3847 h30
  text "C-" at 1712,3847 h30
  text "B-" at 1852,3847 h30
  text "B+" at 1987,3847 h30
  text "A+" at 2127,3847 h30
  text "A-" at 2262,3847 h30
  text "CH6(+)" at 1027,2147 h30
  text "CH1(-)" at 2252,2142 h30
  text "CH4(+)" at 1492,2117 h30
  text "CH3(-)" at 1772,2117 h30
  text "CH5(-)" at 1242,2112 h30
  text "CH2(+)" at 1967,2042 h30
  text "CH7(-)" at 982,1997 h30
  text "CH0(+)" at 2282,1957 h30
  text "SDO" at 2472,1467 h30
  text "-10V" at 2797,1467 h30
  text "SCK" at 2472,1372 h30
  text "+10.5V" at 2797,1372 h30
  text "SDI" at 2482,1277 h30
  text "+5V" at 2797,1277 h30
  text "+3.3V" at 2797,1172 h30
  text "U1TX" at 2452,1167 h30
  text "GND" at 2797,1072 h30
  text "D-" at 2537,932 h30
  text "D+" at 2537,827 h30
  text "UL-SWAP-DAQ-1" at 427,737 h50
Mechanical 1:
  the board outline again, w47.24